# Altium PCB PCB1.PcbDoc
Units mm, origin at the board's own origin, x right, y up, seen from the top; angles counter-clockwise.
Board outline 54.87 x 27.43 mm, 2 copper layers (Top Layer, Bottom Layer); 11 components, 6 nets, 25 pads, 0 vias.
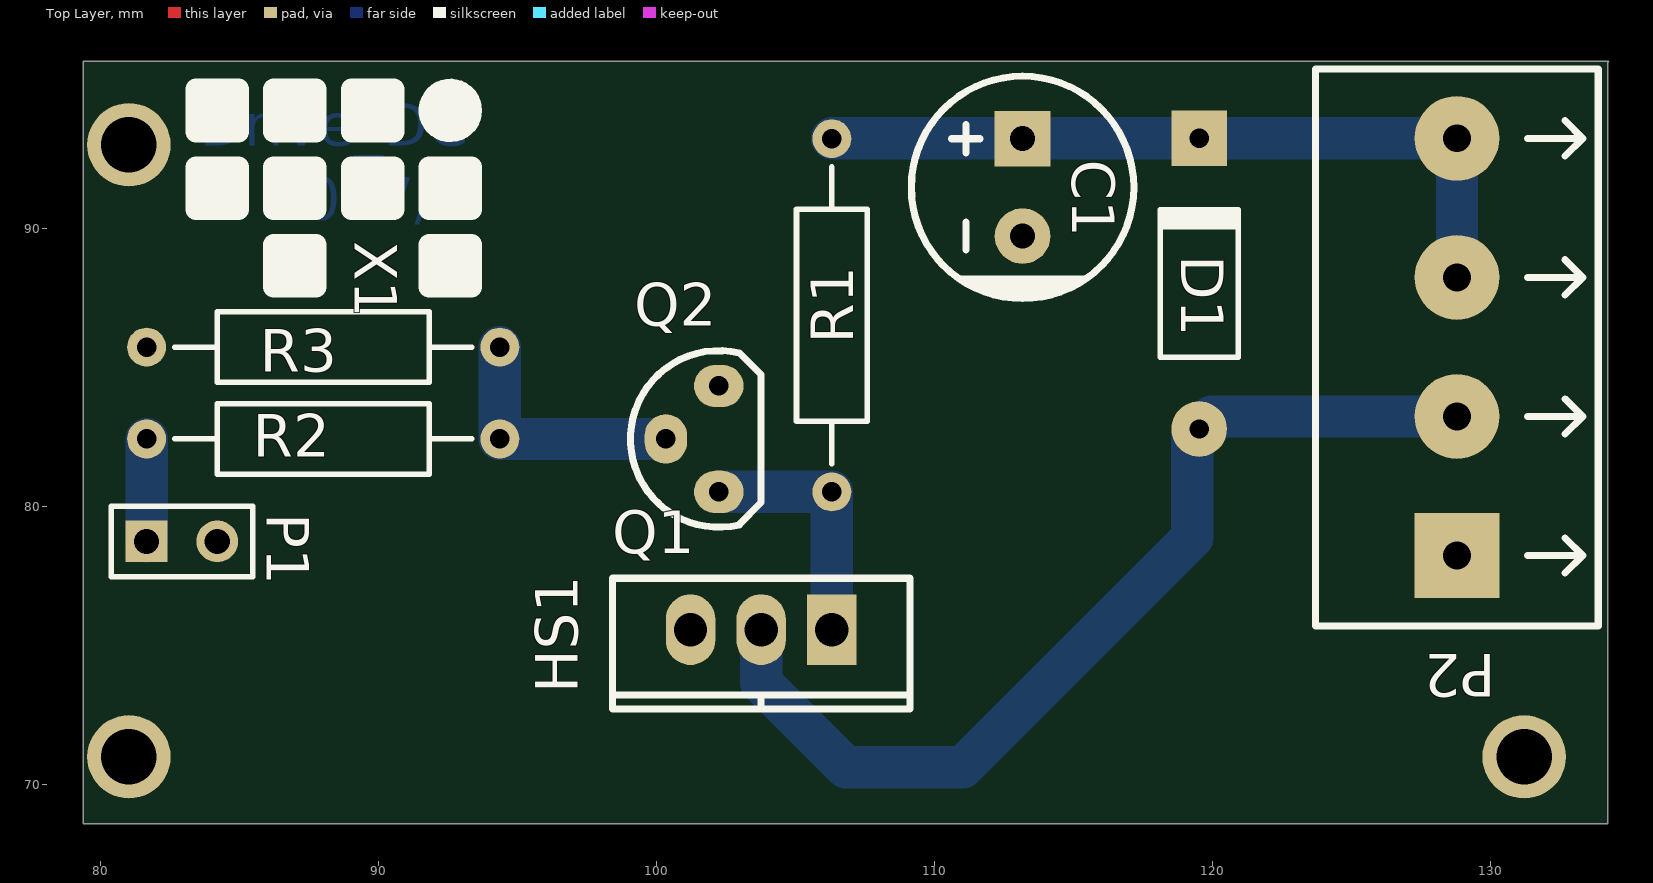
[diagram p0: Top Layer view]
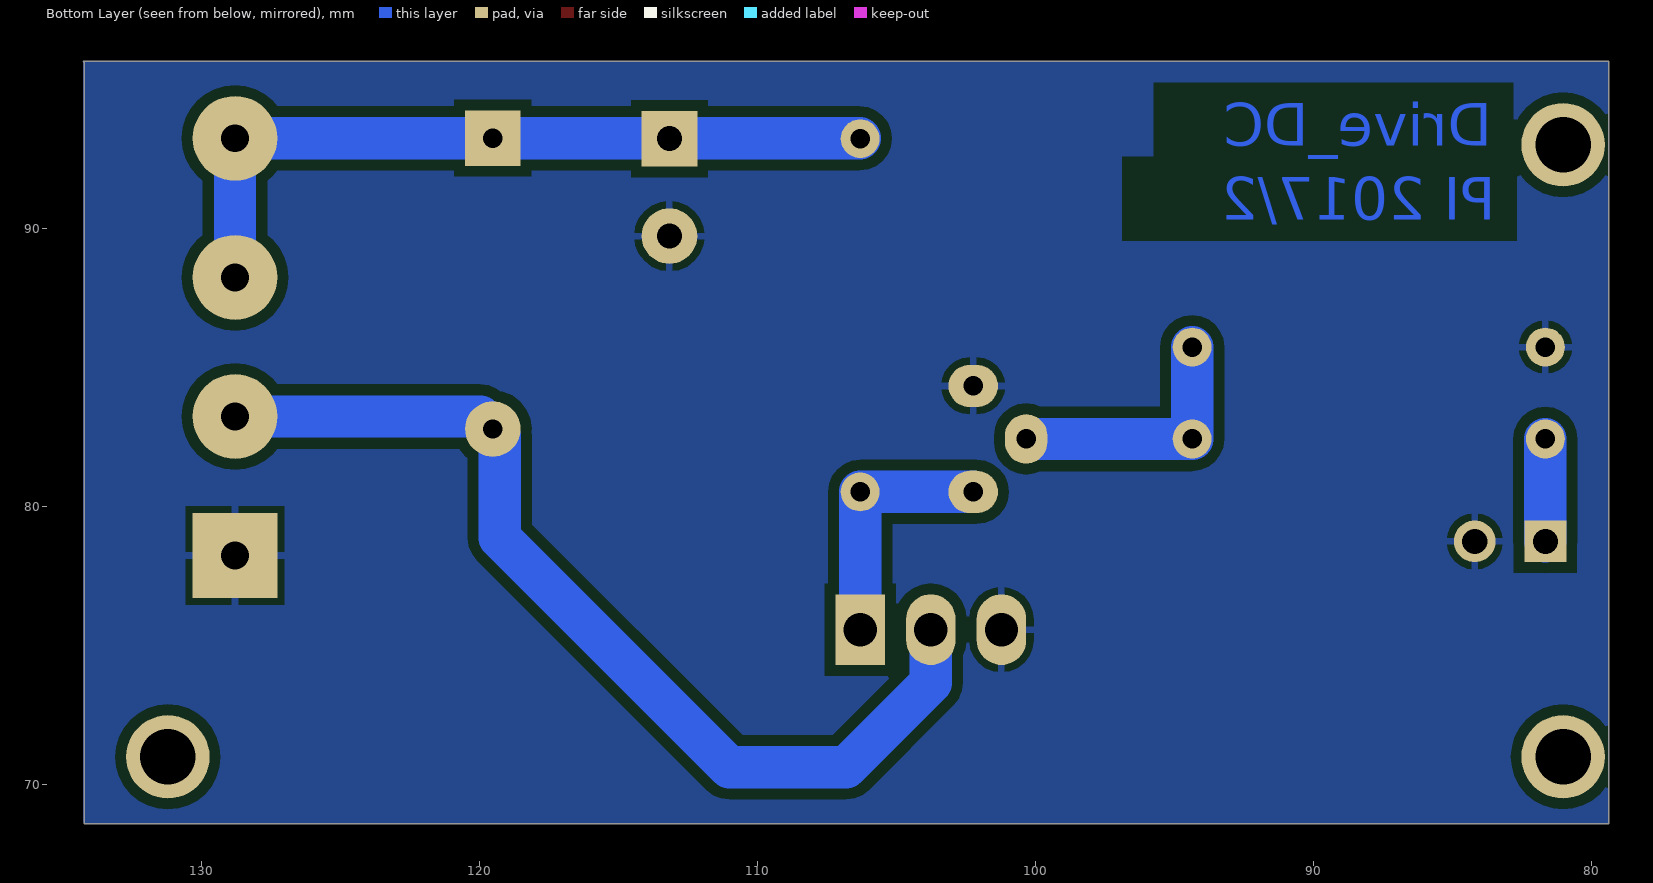
[diagram p1: Bottom Layer view, seen from below]

## Layer stack, top to bottom
Top Layer: signal copper 0.0356
Dielectric: dielectric 0.32, FR-4, Dk 4.8
Bottom Layer: signal copper 0.0356

## Board outline
79.375,96.012 79.375,68.58 134.195,68.58 134.195,95.966 134.241,96.012

## Design rules (kind name [scope] priority, off if disabled: settings)
Clearance [All] p1: gap=0.381
PolygonConnect [All] p1: connectstyle=Relief reliefconductorwidth=0.254 reliefentries=4 polygonreliefangle="90 Angle" airgapwidth=0.254
RoomDefinition Sheet1 [InComponentClass('Sheet1')] p1: confinementstyle=ConfineIn formatcopy=TRUE lockcomponents=FALSE outline 178.943,26.924 256.032,26.924 256.032,50.546 178.943,50.546
RoutingVias [All] p1: holewidth=0.711 width=2 viastyle="Through Hole" minholewidth=0.711 minwidth=1.27 maxholewidth=0.711 maxwidth=2
SolderMaskExpansion [All] p1: expansion=0.102
Width [All] p1: maxlimit=1.905 minlimit=0.381 preferedwidth=1.27
28 further rules are at their usual default settings.

## Classes and differential pairs
component class Sheet1: C1 D1 P1 P2 Q1 Q2 R1 R2 R3 X1

## Components (designator, comment, footprint, x,y, rotation, side; value= is the part's Value field where it differs from the comment)
C1 "1000uF" CP-RAD-8.0mm-20.0mm-3.5mm 113.157,93.218 r270 top
D1 "Diode 1N4007" DO-41 119.507,88.011 r90 top
HS1 "HS-TO-220" HS-TO-220-180847 103.759,70.739 r180 top
P1 "DATA" HDR1X2 81.661,78.74 r0 top
P2 "SOURCE" KRE_4 128.778,78.232 r90 top
Q1 "IRFZ46N" TO-220/123 106.299,75.565 r180 top
Q2 "BC548" TO-92/CBE 102.235,80.518 r90 top
R1 "Res Semi" AXIAL-0.5 106.299,86.868 r90 top
R2 "Res Semi" AXIAL-0.5 88.011,82.423 r0 top
R3 "Res Semi" AXIAL-0.5 88.011,85.725 r0 top
X1 "IFSC" IFSC_SILK 92.583,94.234 r270 top

## Footprints (in the part's own frame and the unit in brackets; to place one, negate y for a bottom-side part, rotate by r counter-clockwise, add the part's x,y. Pads: shape width x height; smd on the part's side, far side on the other; paste and mask are expansions set on the pad)
AXIAL-0.5 [mm] "Axial Device, Thru-Hole; 2 Leads; 0.5 in Pin Spacing"
  round 1.4 hole 0.7: 1(-6.35,0) 2(6.35,0)
  silkscreen extent -5.33,-1.27 5.33,1.27
CP-RAD-8.0mm-20.0mm-3.5mm [mm] "Radial Capacitor; D 8.0mm; L 20.0mm; P 3.5mm"
  rect 2x2 hole 0.9: 1(0,0)
  round 2 hole 0.9: 2(3.5,0)
  silkscreen extent -2.25,-4 5.75,4
DO-41 [mm] "Diode, Axial; Body 5.2 x 2.7 mm (LxDia. max), Lead Dia. 0.86 mm (max)"
  round 2 hole 0.7: 1(-5.23,0)
  rect 2x2 hole 0.7: 2(5.23,0)
  silkscreen extent -2.65,-1.4 2.75,1.4
HDR1X2 [mm] "Connector; Header; 2 Position"
  rect 1.5x1.5 hole 0.9: 1(0,0)
  round 1.5 hole 0.9: 2(2.54,0)
  silkscreen extent -1.27,-1.27 3.81,1.27
HS-TO-220-180847 [mm] "Heatsink TO-220 180847 180847 19x9.5x19mm"
  body extent -9.5,-8.87 9.5,1.63, height 23.7
IFSC_SILK [mm] "Logomarca do IFSC"
  silkscreen extent -1.02,-9.14 6.35,1.02
KRE_4 [mil] "Terminal Block 4 pins"
  rect 120x120 hole 39.37: 1(0,0)
  round 120 hole 39.37: 2(196.85,0) 3(393.7,0) 4(590.55,0)
  silkscreen extent -100,-200 689,200, body extent -123,-190 688,216, height 559
TO-92/CBE [mil] "Transistor Outline Package, Case Style 92 CBE; 3D Sergey Atanov"
  oval 70x60 hole 27.56: B(75,75)
  oval 60x70 hole 27.56: C(0,0) E(150,0)
  silkscreen extent -50,-60 200,125, body extent -37,-50 187,100, height 239
TO-220/123 [mm] "TO, Thru-Hole, Vertical, Heatsink Mounted; 3 In-Line Leads; Pitch 2.54 mm"
  rect 1.778x2.54 hole 1.2: 1(0,0)
  oval 1.778x2.54 hole 1.2: 2(2.54,0) 3(5.08,0)
  silkscreen extent -2.81,-1.85 7.89,2.85, body extent -3.07,-1.49 8.15,3.2, height 21.13

## Part data
C1: library part Capacitor-Electrolytic, "Electrolytic Capacitor"
D1: "1 Amp General Purpose Rectifier"
HS1: "Heatsink TO-220"
P1: library part "Header 2", "Header, 2-Pin"
P2: library part KRE_4, "Terminal Block 1x4"
Q1: "HEXFET Power MOSFET"
Q2: "NPN Epitaxial Silicon Transistor"
R1 R2 R3: "Semiconductor Resistor"
X1: "Logomarca IFSC"

## Free pads (board coordinates)
  round 3 hole 2: 1(81.026,93) 2(81.026,70.993) 3(131.191,70.993)

## Nets (pads, with @x,y where several pads share a name; then routed paths per layer and width w, separated by ;. In a path a pad name is that pad's centre, name@x,y a point inside that pad or via, vN(x,y) a via of type N, cw(c..) or ccw(c..) an arc to the next point about the centre after c; other vN are vias at no path point)
GND: C1.2 P1.2 P2.1 Q1.3 Q2.E R3.1
NetD1_1: D1.1 P2.2 Q1.2 | length 35.2
  Bottom Layer w1.524: Q1.2 103.759,73.66 106.807,70.612 110.998,70.612 119.253,78.867 D1.1@119.253,82.527 ; D1.1 119.958,83.232 P2.2
NetP1_1: P1.1 R2.1 | length 3.7
  Bottom Layer w1.524: P1.1 R2.1
NetQ1_G: Q1.1 Q2.C R1.1 | length 9
  Bottom Layer w1.524: Q2.C R1.1 Q1.1
NetQ2_B: Q2.B R2.2 R3.2 | length 9.3
  Bottom Layer w1.524: R3.2 R2.2 Q2.B
VCC: C1.1 D1.2 P2.3 P2.4 R1.2 | length 27.5
  Top Layer w0.381: P2.4@128.769,93.368 P2.4@128.778,93.359
  Bottom Layer w1.524: R1.2@106.313,93.232 P2.4 P2.3

## Polygon pours and split planes (outlines as drawn)
GND on Bottom Layer "Top Layer-No Net" (solid, pour order 3): 79.375,96.012 79.375,68.58 134.366,68.58 134.241,68.699 134.241,96.012

## Other copper
Bottom Layer:
  text "Drive_DC" at 83.566,92.964 h1.52
  text "PI 2017/2" at 83.439,90.297 h1.52